# Altium PCB PCB1.PcbDoc (part 3 of 3)
Units mm, origin at the board's own origin, x right, y up, seen from the top; angles counter-clockwise.
Board outline 238 x 185 mm, 2 copper layers (Top Layer, Bottom Layer); 253 components, 247 nets, 920 pads, 36 vias.
Unrouted connection lines stored in the file: 56.
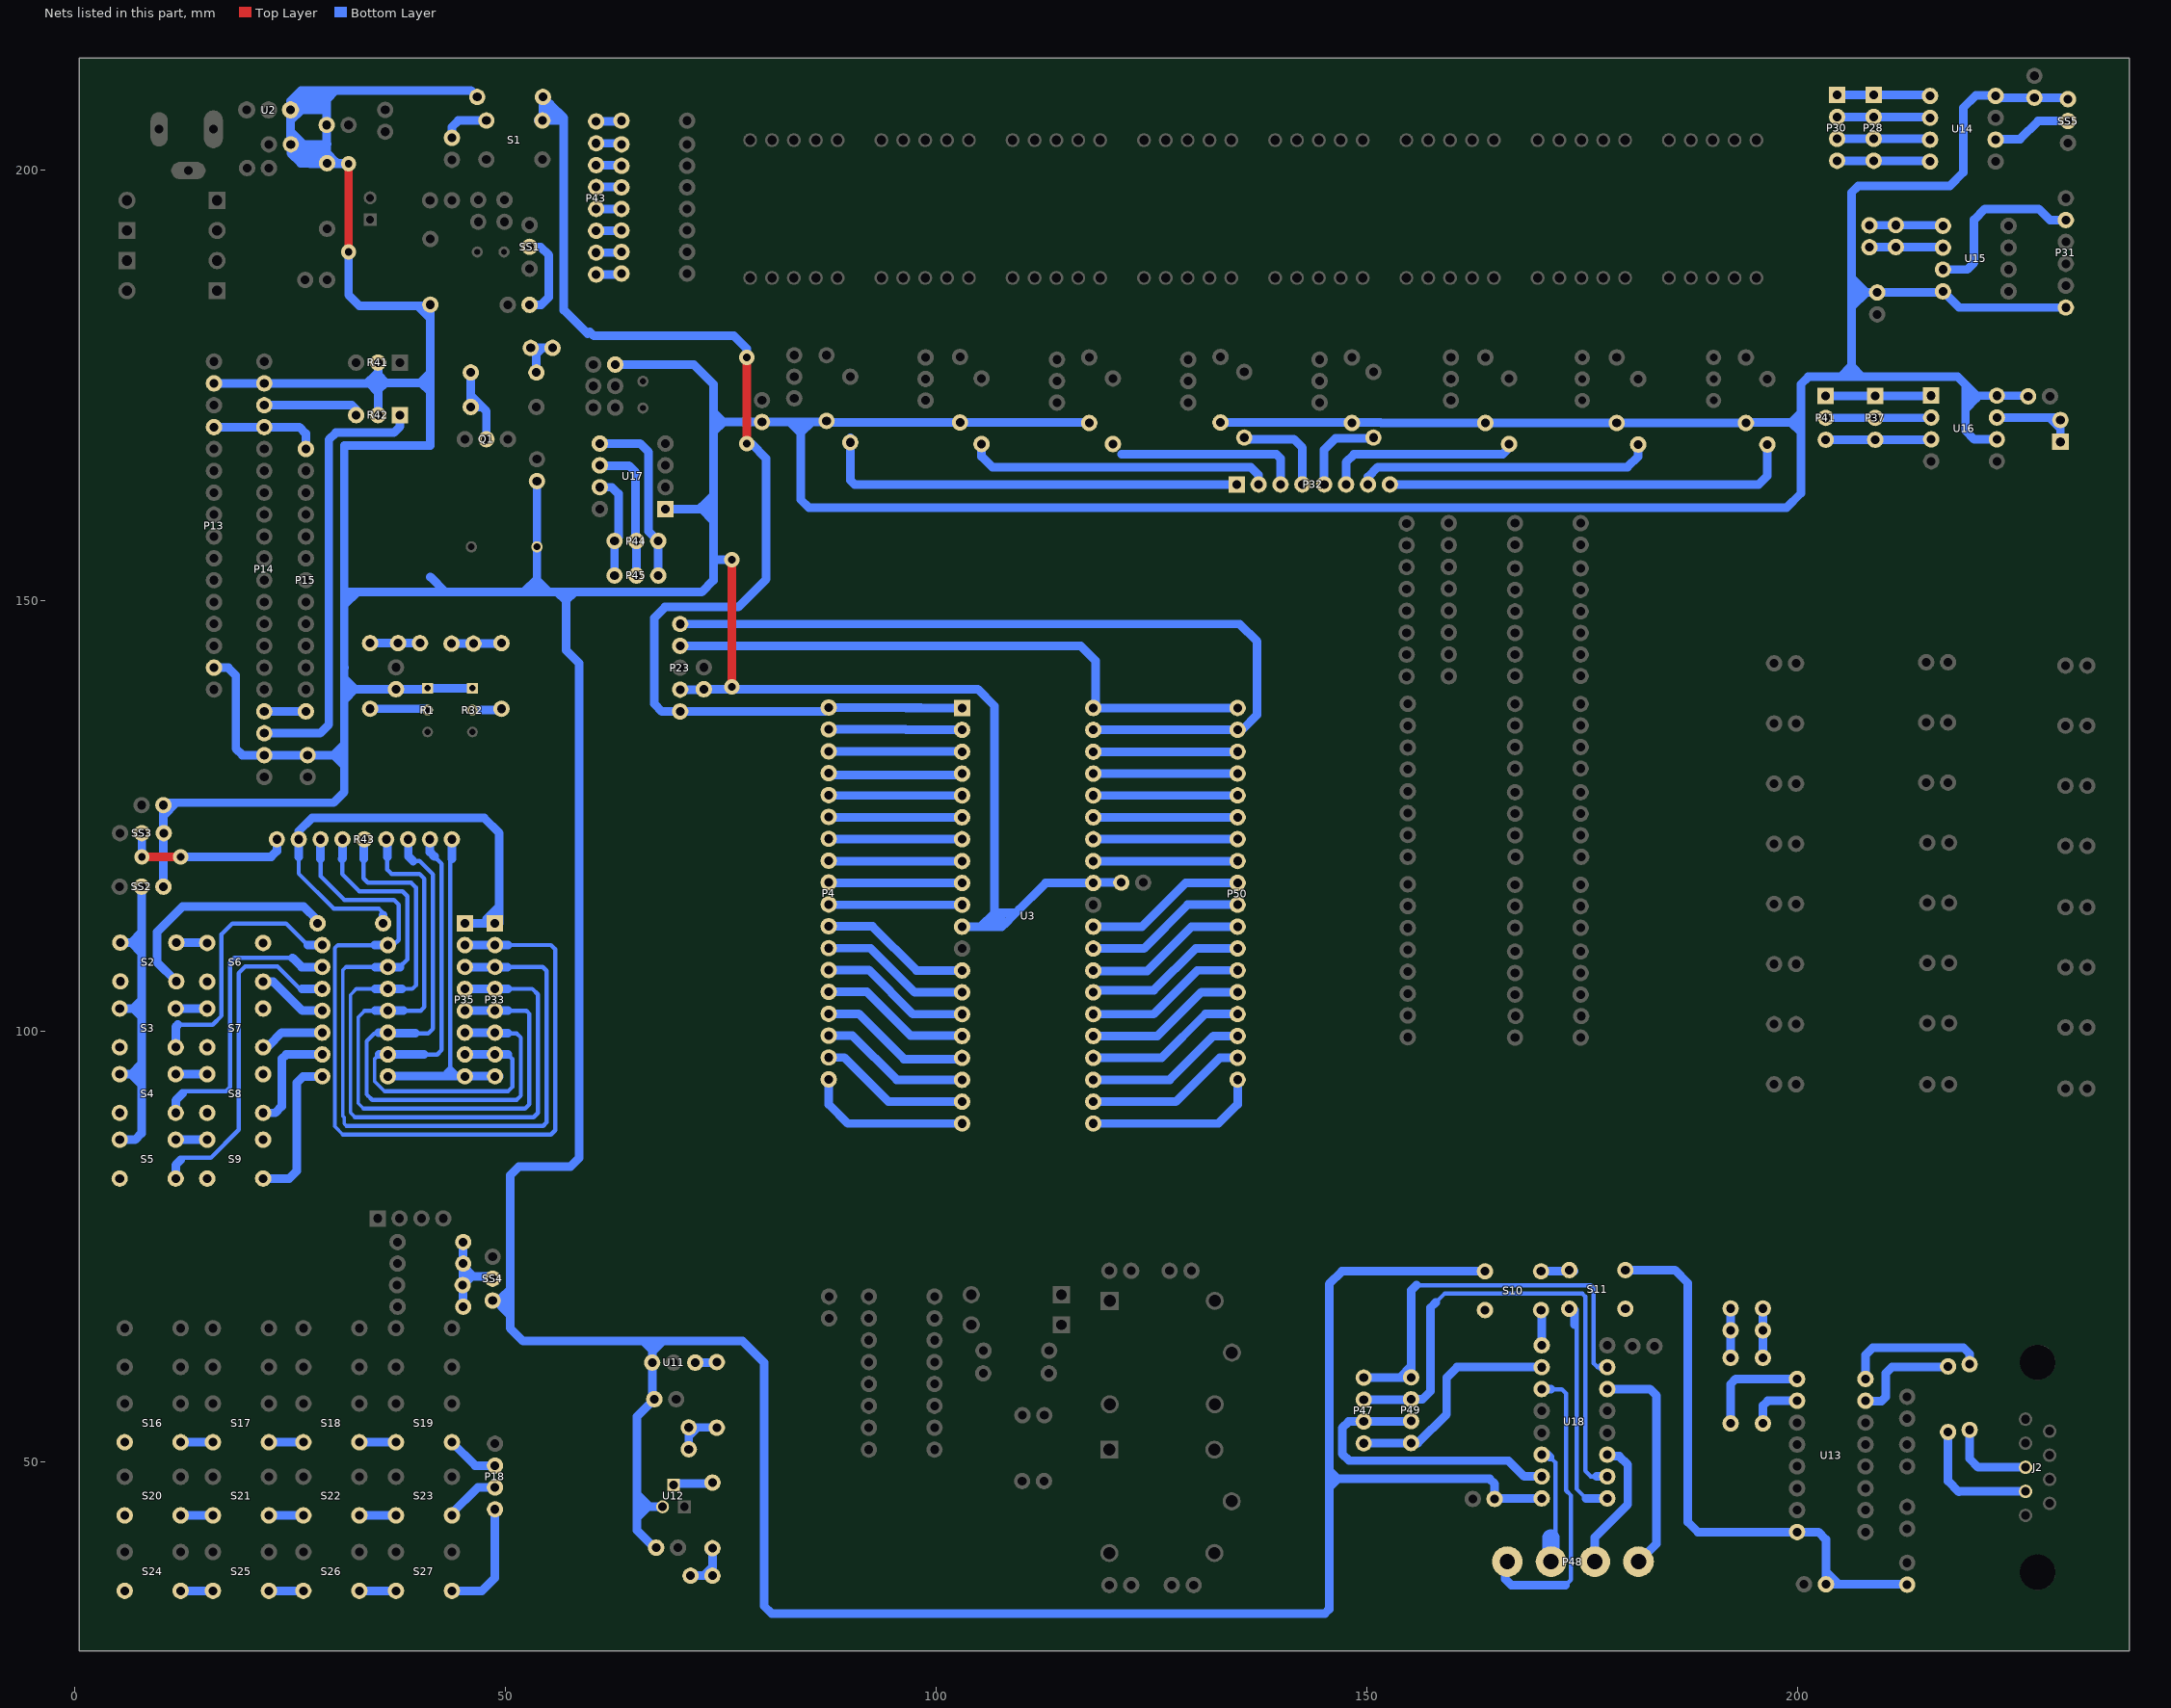
[diagram p3: the nets of this part, all layers, seen from the top]

## Via types
v1: diameter 1.778, hole 0.889, Top Layer to Bottom Layer, 36 vias

## Nets (pads, with @x,y where several pads share a name; then routed paths per layer and width w, separated by ;. In a path a pad name is that pad's centre, name@x,y a point inside that pad or via, vN(x,y) a via of type N, cw(c..) or ccw(c..) an arc to the next point about the centre after c; other vN are vias at no path point) (continued)
NetP18_2: P18.2 S16.3 S16.4 S17.3 S17.4 S18.3 S18.4 S19.3 S19.4 | length 18.1
  Bottom Layer w1: S16.4@12.25,52.25 S17.3@16,52.25 ; S17.4@22.5,52.25 S18.3@26.5,52.25 ; S18.4@33,52.25 S19.3@37.25,52.25 ; S19.4@43.75,52.25 46.46,49.54 P18.2@48.75,49.54
NetP18_3: P18.3 S20.3 S20.4 S21.3 S21.4 S22.3 S22.4 S23.3 S23.4 | length 18.5
  Bottom Layer w1: S20.4@12.25,43.75 S21.3@16,43.75 ; S21.4@22.5,43.75 S22.3@26.5,43.75 ; S22.4@33,43.75 S23.3@37.25,43.75 ; S23.4@43.75,43.75 43.75,44 46.75,47 P18.3@48.75,47
NetP18_4: P18.4 S24.3 S24.4 S25.3 S25.4 S26.3 S26.4 S27.3 S27.4 | length 25.6
  Bottom Layer w1: S24.4@12.25,35 S25.3@16,35 ; S25.4@22.5,35 S26.3@26.5,35 ; S26.4@33,35 S27.3@37.25,35 ; S27.4@43.75,35 47.25,35 48.75,36.5 P18.4@48.75,44.46
NetP19_1: P19.1 R28.1 | length 7.2
  Bottom Layer w1: P19.1@71.46,36.75 73,36.75 ; R28.1@73.603,39.776 R28.1@73.616,39.789 ; R28.1@74,39.94 74,37.75 ; 73,36.75 74,37.75 ; 73,36.75 P19.1@74,36.75 74,37.75
NetP20_1: P20.1 P20.2 R29.2 | length 7
  Bottom Layer w1: P20.2@71,53.973 72.25,53.973 ; P20.1@71.25,51.433 71.25,52.973 ; P20.2@71.25,53.973 71.25,52.973 ; R29.2@74,53.913 73.94,53.973 72.25,53.973 ; 71.25,52.973 72.25,53.973
NetP21_1: P21.1 SS1.2 | length 10.1
  Bottom Layer w1: P21.1@52.77,184.364 54.114,184.364 55,185.25 55,190.135 54.04,191.095 SS1.2@52.77,191.095
NetP22_1: P22.1 P22.2 R31.1 | length 5.7
  Bottom Layer w1: R31.1@195.977,62.06 195.977,64.71 P22.2@195.977,67.79
NetP24_1: P24.1 P24.2 R37.2 | length 6.6
  Bottom Layer w1: R37.2@53.56,176.5 P24.1@53.56,178.69 ; 54.25,179.353 54.223,179.353 ; P24.2@55.437,179.353 54.223,179.353 ; P24.1@53.56,178.69 54.223,179.353 ; P24.1@53.56,178.69 P24.1@52.897,179.353 54.223,179.353
NetP25_1: P25.1 P25.2 R34.2 | length 5.2
  Bottom Layer w1: R34.2@192.227,62.06 192.227,64.75 P25.2@192.227,67.29
NetP26_1: P26.1 P26.2 R38.1 | length 5.8
  Bottom Layer w1: R38.1@34.25,145.06 P26.2@40,145.06
NetP27_1: P27.1 P27.2 R39.1 | length 5.8
  Bottom Layer w1: P27.1@43.71,145 P27.2@46.25,145 49.44,145 R39.1@49.5,145.06
NetP28_1: P28.1 P30.1 U14.1 | length 10.9
  Bottom Layer w1: P30.1@204.591,208.719 P28.1@208.841,208.719 215.431,208.719 U14.1@215.471,208.679
NetP28_2: P28.2 P30.2 U14.2 | length 10.9
  Bottom Layer w1: P30.2@204.591,206.179 P28.2@208.841,206.179 215.431,206.179 U14.2@215.471,206.139
NetP28_3: P28.3 P30.3 U14.3 | length 10.9
  Bottom Layer w1: P30.3@204.591,203.639 P28.3@208.841,203.639 215.431,203.639 U14.3@215.471,203.599
NetP28_4: P28.4 P30.4 U14.4 | length 10.9
  Bottom Layer w1: P30.4@204.591,201.099 P28.4@208.841,201.099 215.431,201.099 U14.4@215.471,201.059
NetP32_1: P32.1 R73.2 | length 50
  Bottom Layer w1: R73.2@90,168.94 90,164 90.5,163.5 P32.1@134.88,163.5
NetP32_2: P32.2 R74.2 | length 35.6
  Bottom Layer w1: R74.2@105.25,168.19 105.25,166.75 106.5,165.5 136.5,165.5 137.42,164.58 P32.2@137.42,163.5
NetP32_3: P32.3 R75.2 | length 21.7
  Bottom Layer w1: 121.5,167 139.5,167 140,166.5 140,163.54 P32.3@139.96,163.5
NetP32_4: P32.4 R76.2 | length 11.5
  Bottom Layer w1: R76.2@135.75,168.94 135.94,168.75 141.5,168.75 142.5,167.75 P32.4@142.5,163.5
NetP32_5: P32.5 R77.2 | length 10.5
  Bottom Layer w1: P32.5@145.04,163.5 145,163.54 145,167.5 146.377,168.877 R77.2@150.687,168.877 ; R77.2@150.687,168.877 150.75,168.877 R77.2@150.75,168.94 R77.2@150.687,168.877
NetP32_6: P32.6 R78.2 | length 22.6
  Bottom Layer w1: P32.6@147.58,163.5 147.58,166.08 148.5,167 165.75,167 166.5,167.75 R78.2@166.5,168.19
NetP32_7: P32.7 R79.2 | length 34.6
  Bottom Layer w1: P32.7@150.12,163.5 150.12,164.37 151.25,165.5 180.25,165.5 181.5,166.75 R79.2@181.5,168.13
NetP32_8: P32.8 R80.2 | length 47.9
  Bottom Layer w1: P32.8@152.66,163.5 195.5,163.5 196.5,164.5 R80.2@196.5,168.13
NetP33_1: P33.1 P35.1 R43.2 R50.2 | length 59.3
  Bottom Layer w0.5: 25.96,120.21 25.96,118.29 30,114.25 35.25,114.25 35.75,113.75
  Bottom Layer w1: 25.96,120.21 R43.2@25.96,122.28 25.96,123.21 27.5,124.75 47.5,124.75 49.25,123 49.25,114.5 ; 35.75,113.5 35.766,113.484 R50.2@35.766,112.53 ; P35.1@45.25,112.53 47.75,112.53 ; 47.75,112.53 P33.1@48.75,112.53 49.25,112.53 49.25,114.5 ; 47.75,112.53 47.75,113 49.25,114.5
NetP33_2: P33.2 P35.2 R43.3 R51.2 | length 105.1
  Bottom Layer w0.4: 30.5,110 30.16,109.66 30.16,88.926 31.086,88
  Bottom Layer w0.5: 28.5,120 28.5,118 31.25,115.25 37,115.25 37.56,114.69 37.56,110.576 R51.2@36.974,109.99 ; 30.5,110 30.51,109.99 34.79,109.99 ; 31.086,88 31.25,88 55.25,88 55.75,88.5 55.75,109.5 55.265,109.985 50.25,110
  Bottom Layer w1: 28.5,120 R43.3@28.5,122.28 ; 34.79,109.99 R51.2@36.31,109.99 ; R51.2@36.35,110.03 R51.2@36.31,109.99 ; R51.2@36.75,110.03 36.71,109.99 R51.2@36.31,109.99 ; P35.2@45.25,109.99 49.25,109.99 50.25,110
NetP33_3: P33.3 P35.3 R43.4 R52.2 | length 97
  Bottom Layer w0.4: 31.45,107.45 31.06,107.06 31.06,90.167 31.25,89.977 31.25,89.25 31.5,89
  Bottom Layer w0.5: 31,120 31,118.25 33,116.25 38,116.25 38.56,115.69 38.56,108.322 37.688,107.45 ; 31.45,107.45 34.83,107.45 ; 31.5,89 54.336,89 54.75,89.414 54.75,107 54.3,107.45 50.2,107.45
  Bottom Layer w1: 31,120 31.04,120.04 R43.4@31.04,122.28 ; 34.83,107.45 R52.2@36.31,107.45 37.688,107.45 ; P35.3@45.25,107.45 50.2,107.45
NetP33_4: P33.4 P35.4 R43.5 R53.2 | length 88.9
  Bottom Layer w0.4: 32.5,90 31.96,90.54 31.96,104.21 32.66,104.91
  Bottom Layer w0.5: 32.5,90 53.25,90 53.75,90.5 53.75,104.25 53.09,104.91 50.25,104.91 ; 32.66,104.91 34.87,104.91 ; 33.5,120 33.5,117.75 34,117.25 39,117.25 39.56,116.69 39.56,105.31 39.16,104.91 37.91,104.91
  Bottom Layer w1: 33.5,120 33.5,122.25 33.55,122.25 R43.5@33.58,122.28 ; 34.87,104.91 R53.2@36.31,104.91 37.91,104.91 ; P35.4@45.25,104.91 50.25,104.91
NetP33_5: P33.5 P35.5 R43.6 R54.2 | length 80
  Bottom Layer w0.4: 33.5,91 32.86,91.64 32.86,101.61 33.62,102.37
  Bottom Layer w0.5: 33.5,91 52.25,91 52.75,91.5 52.75,102 52.38,102.37 50.25,102.37 ; 33.62,102.37 34.84,102.37 ; 36.25,120.25 36.25,118.75 36.75,118.25 40,118.25 40.56,117.69 40.56,102.81 40.12,102.37 38.12,102.37
  Bottom Layer w1: 34.84,102.37 R54.2@36.31,102.37 38.12,102.37 ; R43.6@36.12,122.28 36.15,122.25 36.25,122.25 36.25,120.25 ; P35.5@45.25,102.37 50.25,102.37
NetP33_6: P33.6 P35.6 R43.7 R63.2 | length 70.3
  Bottom Layer w0.4: 33.85,97.618 33.85,92.65 33.96,92.54
  Bottom Layer w0.5: 33.85,97.618 33.85,98.85 34.75,99.75 35.189,99.75 35.269,99.83 ; 33.96,92.54 34.5,92 51.25,92 51.75,92.5 51.75,99.25 51.25,99.75 50.25,99.75 ; 38.75,120.25 38.75,120.5 ; 39.25,119.75 40,119.75 41.56,118.19 41.56,100.31 41,99.75 39.56,99.75 39.53,99.78
  Bottom Layer w1: 35.269,99.83 R63.2@36.31,99.83 36.36,99.78 39.53,99.78 ; R43.7@38.66,122.28 38.69,122.25 38.69,120.31 39.25,119.75 ; P35.6@45.25,99.83 49.25,99.83 49.3,99.78 50.22,99.78
NetP33_7: P33.7 P35.7 R43.8 R64.2 | length 61.5
  Bottom Layer w0.4: 35.29,97.29 34.75,96.75 34.75,94.185 35.935,93
  Bottom Layer w0.5: 35.935,93 50.25,93 50.75,93.5 50.75,96.78 50.25,97.28 ; 40.5,97.28 42.03,97.28 42.56,97.81 42.56,119.422 42.5,119.482 42.5,119.5 41.72,120.28
  Bottom Layer w1: 35.29,97.29 R64.2@36.31,97.29 36.32,97.28 40.5,97.28 ; R43.8@41.2,122.28 41.2,120.8 41.72,120.28 ; P35.7@45.25,97.29 49.25,97.29 49.26,97.28 50.25,97.28
NetP33_8: P33.8 P35.8 R43.9 R65.2 | length 43.6
  Bottom Layer w0.5: 42.75,95.03 43,94.78 43,95.19 43.56,95.75 ; 43.75,94.78 43.56,94.97 43.56,95.75 ; 43.75,120 43.56,119.81 43.56,95.75 ; P35.8@44.5,94.78 44.5,94.81 43.56,95.75
  Bottom Layer w1: R65.2@36.31,94.75 36.34,94.78 43,94.78 43.75,94.78 44.5,94.78 P35.8@45.22,94.78 ; R43.9@43.74,122.28 43.74,120.893 43.75,120.883 43.75,120 ; P35.8@45.25,94.75 P35.8@45.22,94.78 ; P33.8@49.25,94.75 49.22,94.78 P35.8@45.22,94.78
NetP34_1: P34.1 P36.1 U15.6 | length 8.6
  Bottom Layer w1: P36.1@208.353,191.045 208.379,191.071 P34.1@211.409,191.071 216.809,191.071 U15.6@216.88,191
NetP34_2: P34.2 P36.2 U15.5 | length 8.6
  Bottom Layer w1: P36.2@208.353,193.585 208.379,193.611 P34.2@211.409,193.611 216.809,193.611 U15.5@216.88,193.54
NetP37_1: P37.1 P41.1 U16.1 | length 12.3
  Bottom Layer w1: P41.1@203.272,173.768 P37.1@209.022,173.768 215.482,173.768 U16.1@215.522,173.808
NetP37_2: P37.2 P41.2 U16.2 | length 12.3
  Bottom Layer w1: P41.2@203.272,171.228 P37.2@209.022,171.228 215.482,171.228 U16.2@215.522,171.268
NetP37_3: P37.3 P41.3 U16.3 | length 12.3
  Bottom Layer w1: P41.3@203.272,168.688 P37.3@209.022,168.688 215.482,168.688 U16.3@215.522,168.728
NetP39_1: P39.1 P39.2 U16.7 | length 11.8
  Bottom Layer w1: U16.7@223.142,171.268 229.254,171.268 ; P39.1@230.522,168.438 230.522,170 ; 229.254,171.268 230.522,170 ; 229.254,171.268 230.232,171.268 P39.2@230.522,170.978 230.522,170
NetP43_1: P43.1 R62.1 | length 3
  Bottom Layer w0.5: R62.1@63.32,187.88 R62.1@63.44,188
  Bottom Layer w1: P43.1@60.5,187.88 R62.1@63.32,187.88
NetP43_2: P43.2 R61.1 | length 3
  Bottom Layer w1: P43.2@60.5,190.42 63.36,190.42 R61.1@63.44,190.5
NetP43_3: P43.3 R60.1 | length 3
  Bottom Layer w1: P43.3@60.5,192.96 63.4,192.96 R60.1@63.44,193
NetP43_4: P43.4 R59.1 | length 2.9
  Bottom Layer w1: P43.4@60.5,195.5 R59.1@63.44,195.5
NetP43_5: P43.5 R58.1 | length 3
  Bottom Layer w1: P43.5@60.5,198.04 63.4,198.04 R58.1@63.44,198
NetP43_6: P43.6 R57.1 | length 3
  Bottom Layer w1: P43.6@60.5,200.58 63.36,200.58 R57.1@63.44,200.5
NetP43_7: P43.7 R56.1 | length 3
  Bottom Layer w1: P43.7@60.5,203.12 63.32,203.12 R56.1@63.44,203
NetP43_8: P43.8 R55.1 | length 3
  Bottom Layer w1: P43.8@60.5,205.66 63.35,205.66 R55.1@63.44,205.75
NetP44_1: P44.1 P45.1 U17.5 | length 20.9
  Bottom Layer w1: U17.5@60.923,168.253 65.593,168.253 66.585,167.261 66.585,158.051 P44.1@67.713,156.923 P45.1@67.713,152.923
NetP44_2: P44.2 P45.2 U17.6 | length 16.5
  Bottom Layer w1: U17.6@60.923,165.713 60.963,165.673 64.309,165.673 65.085,164.897 65.085,157.43 65.173,157.342 P44.2@65.173,156.923 P45.2@65.173,152.923
NetP44_3: P44.3 P45.3 U17.7 | length 12.1
  Bottom Layer w1: U17.7@60.923,163.173 62.309,163.173 63.085,162.397 63.085,157.375 P44.3@62.633,156.923 P45.3@62.633,152.923
NetP47_1: P47.1 P49.1 U18.15 | length 49.1
  Bottom Layer w0.5: 155.75,70.5 176,70.5 176.335,70.165 176.335,61.415 176.781,60.969
  Bottom Layer w1: P47.1@149.624,59.745 153.814,59.745 ; 155.75,70.5 155.124,69.874 155.124,61.055 ; U18.15@177.219,60.969 U18.15@177.906,60.969 ; 153.814,59.745 155.124,61.055 ; 153.814,59.745 155.084,59.745 P49.1@155.124,59.785 155.124,61.055
NetP47_2: P47.2 P49.2 U18.10 | length 59.7
  Bottom Layer w0.5: 158,68.5 159,69.5 175,69.5 175.335,69.165 175.335,48.934 176,48.269 176.656,48.269
  Bottom Layer w1: P47.2@149.624,57.205 155.084,57.205 P49.2@155.124,57.245 156.454,57.245 157.374,58.165 157.374,67.874 158,68.5 ; 176.656,48.269 U18.10@177.906,48.269
NetP47_3: P47.3 P49.3 U18.7 | length 35.6
  Bottom Layer w1: P49.3@155.124,54.705 155.084,54.665 P47.3@149.624,54.665 147.874,54.665 147.124,53.915 147.124,50.915 147.924,50.115 166.424,50.115 168.27,48.269 U18.7@170.286,48.269
NetP47_4: P47.4 P49.4 U18.2 | length 27.1
  Bottom Layer w1: P47.4@149.624,52.125 149.664,52.165 P49.4@155.124,52.165 155.915,52.165 159.25,55.5 159.25,59.75 160.469,60.969 U18.2@170.286,60.969 U18.2@170.616,60.969
NetP48_1: P48.1 U18.3 | length 35.3
  Bottom Layer w0.5: 171.374,58.415 172.624,58.415 173.124,57.915 173.124,46.637 173.704,46.057 173.704,36.307 173.036,35.639
  Bottom Layer w1: P48.1@166.296,38.389 166.036,38.129 166.036,36.389 166.786,35.639 173.036,35.639 ; U18.3@170.246,58.389 U18.3@170.286,58.429 170.3,58.415 171.374,58.415
NetP48_2: P48.2 U18.6 | length 13.6
  Bottom Layer w0.5: 171.268,50.521 171.874,49.915 171.874,41.665
  Bottom Layer w1: U18.6@170.456,50.639 U18.6@170.286,50.809 170.98,50.809 171.268,50.521 ; P48.2@171.376,38.389 P48.2@171.624,38.637
  Bottom Layer w2: P48.2@171.376,38.389 171.376,41.167
NetP48_3: P48.3 U18.11 | length 15.7
  Bottom Layer w1: P48.3@176.456,38.389 176.456,41.206 180.282,45.032 180.282,49.643 179.286,50.639 178.076,50.639 U18.11@177.906,50.809
NetP48_4: P48.4 U18.14 | length 26.2
  Bottom Layer w1: U18.14@177.906,58.429 182.86,58.429 183.624,57.665 183.624,40.477 P48.4@181.536,38.389
NetQ1_2: Q1.2 R37.1 R40.2 | length 10.3
  Bottom Layer w1: R40.2@45.94,172.75 45.94,173.75 ; R37.1@45.94,176.5 45.94,173.75 ; R40.2@46.5,172.5 47.25,172.5 ; Q1.2@47.75,168.75 47.75,172 47.25,172.5 ; 45.94,173.75 46,173.75 47.25,172.5
NetR1_2: R1.2 R38.2 | length 6.7
  Bottom Layer w1: R38.2@34.25,137.44 40.775,137.44 R1.2@40.925,137.29
NetR28_2: R28.2 U12.2 | length 3.9
  Bottom Layer w1: U12.2@69.75,47.473 73.552,47.473 R28.2@73.616,47.409
NetR29_1: R29.1 U11.OUT | length 2
  Bottom Layer w1: U11.OUT@72.001,61.5 73.967,61.5 R29.1@74,61.533
NetR30_2: R30.2 U13.8 | length 16.7
  Bottom Layer w1: U13.8@207.886,59.605 207.886,62.386 208.75,63.25 219.25,63.25 219.977,62.523 R30.2@219.977,61.31
NetR31_2: R31.2 U13.10 | length 6.3
  Bottom Layer w1: R31.2@195.977,54.44 195.977,56.5 196.542,57.065 U13.10@199.946,57.065
NetR32_2: R32.2 R39.2 | length 3.1
  Bottom Layer w1: R32.2@46.132,137.29 49.227,137.29 R39.2@49.25,137.267
NetR33_2: R33.2 R66.2 R67.2 R68.2 SS4.2 | length 14.1
  Bottom Layer w1: R67.2@45,70.5 R67.2@45.06,70.56 ; R68.2@45.06,68 R67.2@45.06,70.56 ; R33.2@45.06,75.5 R66.2@45.06,73 R66.2@45.06,72.69 ; SS4.2@48.48,71.25 48.23,71.5 46.25,71.5 ; R67.2@45.06,70.56 46,71.5 ; R67.2@45.06,70.56 45.06,71.5 ; 45.06,71.5 46,71.5 ; 45.06,71.5 R66.2@45.06,72.69 ; R66.2@45.06,72.69 46.25,71.5 ; 46,71.5 46.25,71.5
NetR34_1: R34.1 U13.9 | length 12.6
  Bottom Layer w1: R34.1@192.227,54.44 192.227,59 192.832,59.605 U13.9@199.977,59.605
NetR36_1: R36.1 U13.7 | length 13.1
  Bottom Layer w1: U13.7@207.886,57.065 207.951,57 209.727,57 210.227,57.5 210.227,60.25 210.977,61 R36.1@217.667,61
NetR43_1: R43.1 SS3.2 | length 20.1
  Top Layer w1: v1(7.75,120.25) v1(12.25,120.25)
  Bottom Layer w1: v1(7.75,120.25) SS3.2@7.75,123 ; v1(12.25,120.25) 22.75,120.25 23.42,120.92 R43.1@23.42,122.28
NetR50_1: R50.1 S2.3 S2.4 | length 27.9
  Bottom Layer w1: S2.4@11.53,106 S2.4@11.75,105.78 9.5,108.03 9.5,111.5 12.5,114.5 26.5,114.5 28.146,112.854 R50.1@28.146,112.53
NetR51_1: R51.1 S3.3 S3.4 | length 30.9
  Bottom Layer w0.5: 11.927,100.75 15.97,100.75 17,101.78 17,111.25 18.25,112.5 24.5,112.5 27.01,109.99
  Bottom Layer w1: S3.4@11.675,98.124 11.675,100.498 11.927,100.75 ; 27.01,109.99 R51.1@28.69,109.99
NetR52_1: R52.1 S4.3 S4.4 | length 34.2
  Bottom Layer w0.5: 12.5,92.78 12.75,93.03 17.53,93.03 18,93.5 18,108 18.5,108.5 25.25,108.5
  Bottom Layer w1: S4.4@11.675,90.504 11.675,91.955 12.5,92.78 ; 25.25,108.5 26.3,107.45 R52.1@28.69,107.45
NetR53_1: R53.1 S5.3 S5.4 | length 40.2
  Bottom Layer w0.5: 12.25,85.03 12.5,85.28 15.75,85.28 19,88.53 19,106.75 19.75,107.5 23.5,107.5 26.09,104.91 26.5,104.91
  Bottom Layer w1: S5.4@11.675,82.884 11.675,84.455 12.25,85.03 ; 26.34,104.91 R53.1@28.69,104.91 R53.1@28.57,105.03
NetR54_1: R54.1 S6.3 S6.4 | length 8.3
  Bottom Layer w1: S6.4@21.835,105.744 23.006,105.744 26.38,102.37 R54.1@28.69,102.37
NetR63_1: R63.1 S7.3 S7.4 | length 7.6
  Bottom Layer w1: S7.4@21.835,98.124 22,98.289 22.442,98.289 23.983,99.83 R63.1@28.69,99.83
NetR64_1: R64.1 S8.3 S8.4 | length 12.9
  Bottom Layer w1: S8.4@21.835,90.504 23.224,90.504 24,91.28 24,96.78 24.51,97.29 R64.1@28.69,97.29
NetR65_1: R65.1 S9.3 S9.4 | length 17.8
  Bottom Layer w1: S9.4@21.835,82.884 24.854,82.884 25.75,83.78 25.75,94.03 26.47,94.75 R65.1@28.69,94.75
NetS2_1: S2.1 S2.2 S3.1 S3.2 S4.1 S4.2 S5.1 S5.2 S6.1 S6.2 S7.1 S7.2 S8.1 S8.2 S9.1 S9.2 SS2.2 | length 63.1
  Bottom Layer w1: S5.1@5.175,87.384 6.948,87.384 7.71,88.146 7.71,93.794 ; S4.1@5.175,95.004 6.5,95.004 ; S3.1@5.175,102.624 6.75,102.624 ; S2.1@5.25,110.28 6.5,110.28 ; 7.626,102.624 6.75,102.624 ; SS2.2@7.71,116.78 7.71,111.49 ; SS2.2@7.75,116.74 SS2.2@7.79,116.78 ; S5.2@11.675,87.384 S9.1@15.335,87.384 ; S4.2@11.675,95.004 S8.1@15.335,95.004 ; S3.2@11.675,102.624 S7.1@15.335,102.624 ; S2.2@11.75,110.28 12.477,110.28 12.481,110.284 13.519,110.284 13.523,110.28 15.299,110.28 S6.1@15.335,110.244 ; 6.5,95.004 7.71,96.214 ; 6.5,95.004 7.706,95.004 7.71,95 ; 6.5,95.004 7.71,93.794 ; 6.5,110.28 7.71,111.49 ; 6.5,110.28 7.675,110.28 7.71,110.245 ; 6.5,110.28 7.71,109.07 ; 6.75,102.624 7.71,103.584 ; 6.75,102.624 7.624,101.75 7.71,101.75 ; 7.71,93.794 7.71,95 ; 7.71,95 7.71,96.214 ; 7.71,96.214 7.71,101.75 ; 7.71,101.75 7.71,103.584 ; 7.71,103.584 7.71,109.07 ; 7.71,109.07 7.71,110.245 ; 7.71,110.245 7.71,111.49
NetS10_3: S10.3 S10.4 U18.1 | length 4.1
  Bottom Layer w1: U18.1@170.286,63.509 S10.4@170.286,67.639
NetS11_3: S11.3 S11.4 U18.9 | length 24.9
  Bottom Layer w0.5: 174.124,65.915 174.335,65.704 174.335,46.84 175.446,45.729
  Bottom Layer w1: S11.3@174.036,67.639 174.085,67.59 174.085,65.915 ; 175.446,45.729 U18.9@177.906,45.729
NetSS5_2: SS5.2 U14.6 | length 9.2
  Bottom Layer w1: U14.6@223.091,203.599 225.831,203.599 227.937,205.705 SS5.2@231.397,205.705
OSC11: 
OSC21: 
RA0: P4.2 U3.2 | length 15.5
  Bottom Layer w1: P4.2@87.5,135.04 96.426,135.04 96.476,134.99 U3.2@102.986,134.99
RA1: P4.3 U3.3 | length 15.5
  Bottom Layer w1: P4.3@87.5,132.5 102.936,132.5 U3.3@102.986,132.45
RA2: P4.4 U3.4 | length 15.6
  Bottom Layer w1: P4.4@87.5,129.96 87.71,129.75 102.826,129.75 U3.4@102.986,129.91
RA3: P4.5 U3.5 | length 15.5
  Bottom Layer w1: P4.5@87.5,127.42 87.55,127.37 U3.5@102.986,127.37
RA4: P4.6 U3.6 | length 15.5
  Bottom Layer w1: P4.6@87.5,124.88 87.55,124.83 U3.6@102.986,124.83
RA5: P4.7 U3.7 | length 15.5
  Bottom Layer w1: P4.7@87.5,122.34 87.55,122.29 U3.7@102.986,122.29
RA6: P4.12 U3.14 | length 17.6
  Bottom Layer w1: P4.12@87.5,109.64 92.36,109.64 97.5,104.5 101.476,104.5 101.486,104.51 U3.14@102.986,104.51
RA7: P4.11 U3.13 | length 17.6
  Bottom Layer w1: P4.11@87.5,112.18 92.57,112.18 97.7,107.05 U3.13@102.986,107.05
RB0: P50.11 U3.33 | length 16.8
  Bottom Layer w1: U3.33@118.226,119.75 134.966,119.75 P50.11@134.976,119.76
RB1: P50.12 U3.34 | length 16.8
  Bottom Layer w1: U3.34@118.226,122.29 134.966,122.29 P50.12@134.976,122.3
RB2: P50.13 U3.35 | length 16.8
  Bottom Layer w1: U3.35@118.226,124.83 134.966,124.83 P50.13@134.976,124.84
RB3: P50.14 U3.36 | length 16.8
  Bottom Layer w1: U3.36@118.226,127.37 134.966,127.37 P50.14@134.976,127.38
RB4: P50.15 U3.37 | length 16.8
  Bottom Layer w1: U3.37@118.226,129.91 134.966,129.91 P50.15@134.976,129.92
RB5: P50.16 U3.38 | length 16.8
  Bottom Layer w1: U3.38@118.226,132.45 134.966,132.45 P50.16@134.976,132.46
RB6: P23.1 P50.17 U3.39 | length 96.1
  Bottom Layer w1: P23.1@70.25,147.29 135.21,147.29 137.25,145.25 137.25,136.75 135.5,135 P50.17@134.976,135 134.966,134.99 U3.39@118.226,134.99
RB7: P23.2 P50.18 U3.40 | length 71.3
  Bottom Layer w1: P23.2@70.25,144.75 116.75,144.75 118.5,143 118.5,137.804 U3.40@118.226,137.53 134.966,137.53 P50.18@134.976,137.54
RC0: P4.13 U3.15 | length 17.6
  Bottom Layer w1: P4.13@87.5,107.1 92.15,107.1 97.28,101.97 101.506,101.97 U3.15@102.986,101.97
RC1: P4.14 U3.16 | length 17.6
  Bottom Layer w1: P4.14@87.5,104.56 91.94,104.56 97,99.5 101.396,99.5 102.916,99.5 U3.16@102.986,99.43
RC2: P4.15 U3.17 | length 17.7
  Bottom Layer w1: P4.15@87.5,102.02 90.98,102.02 96.25,96.75 102.846,96.75 U3.17@102.986,96.89
RC3: P4.16 U3.18 | length 17.8
  Bottom Layer w1: P4.16@87.5,99.48 90.27,99.48 95.4,94.35 U3.18@102.986,94.35 U3.18@102.836,94.5
RC4: P50.3 U3.23 | length 18.9
  Bottom Layer w1: U3.23@118.226,94.35 127.1,94.35 132.19,99.44 P50.3@134.976,99.44
RC5: P50.4 U3.24 | length 18.9
  Bottom Layer w1: U3.24@118.226,96.89 126.14,96.89 131.25,102 134.956,102 P50.4@134.976,101.98
RC6: P50.5 U3.25 | length 18.9
  Bottom Layer w1: U3.25@118.226,99.43 125.68,99.43 130.77,104.52 P50.5@134.976,104.52
RC7: P50.6 U3.26 | length 18.9
  Bottom Layer w1: U3.26@118.226,101.97 125.22,101.97 130.31,107.06 P50.6@134.976,107.06
RD0: P4.17 U3.19 | length 17.6
  Bottom Layer w1: P4.17@87.5,96.94 89.31,96.94 94.44,91.81 U3.19@102.986,91.81
RD1: P4.18 U3.20 | length 19.3
  Bottom Layer w1: P4.18@87.5,94.4 87.5,91.5 89.73,89.27 U3.20@102.986,89.27
RD2: P50.1 U3.21 | length 20.5
  Bottom Layer w1: U3.21@118.226,89.27 132.746,89.27 134.976,91.5 P50.1@134.976,94.36
RD3: P50.2 U3.22 | length 18.9
  Bottom Layer w1: U3.22@118.226,91.81 127.81,91.81 132.9,96.9 P50.2@134.976,96.9
RD4: P50.7 U3.27 | length 18.9
  Bottom Layer w1: U3.27@118.226,104.51 118.466,104.75 125.25,104.75 130.1,109.6 P50.7@134.976,109.6
RD5: P50.8 U3.28 | length 18.9
  Bottom Layer w1: U3.28@118.226,107.05 118.276,107 124.5,107 129.64,112.14 P50.8@134.976,112.14
RD6: P50.9 U3.29 | length 18.9
  Bottom Layer w1: U3.29@118.226,109.59 124.09,109.59 129.18,114.68 P50.9@134.976,114.68
RD7: P50.10 U3.30 | length 18.9
  Bottom Layer w1: U3.30@118.226,112.13 123.88,112.13 128.97,117.22 P50.10@134.976,117.22
RE0: P4.8 U3.8 | length 15.9
  Bottom Layer w1: P4.8@87.5,119.8 87.55,119.75 U3.8@102.986,119.75 U3.8@102.736,119.5
RE1: P4.9 U3.9 | length 15.5
  Bottom Layer w1: P4.9@87.5,117.26 87.55,117.21 U3.9@102.986,117.21
RE2: P4.10 U3.10 | length 15.7
  Bottom Layer w1: P4.10@87.5,114.72 87.55,114.67 U3.10@102.986,114.67 U3.10@102.816,114.5
reset: C19.2 P4.1 P23.5 R35.1 S1.3 S1.4 U3.1 | length 155.1
  Top Layer w1: v1(77.997,178.247) 77.997,168.252 v1(78,168.25)
  Bottom Layer w1: C19.2@43.75,203.75 43.75,205.011 44.5,205.761 S1.4@47.749,205.761 ; S1.3@53.761,205.761 S1.3@54.251,205.761 ; v1(77.997,178.247) 77.997,179.252 76.5,180.75 60.245,180.75 59.747,181.248 59.5,181 56.75,183.75 56.75,206.06 ; v1(78,168.25) 78.5,168.25 80.25,166.5 80.25,152.5 77,149.25 68.5,149.25 67.25,148 67.25,138 68.12,137.13 P23.5@70.25,137.13 87.05,137.13 P4.1@87.5,137.58 98.2,137.58 98.25,137.53 ; 96.476,137.53 98.25,137.53 ; U3.1@102.726,137.79 U3.1@102.986,137.53 98.25,137.53 ; S1.3@54.251,205.761 54.31,205.819 R35.1@54.31,208.5 55.155,207.655 ; S1.3@54.251,205.761 55.5,205.761 ; 55.155,206.88 55.5,206.535 55.5,205.761 ; 55.155,206.88 55.155,206.106 55.5,205.761 ; 55.155,206.88 55.155,207.655 ; 55.155,207.655 56.75,206.06 ; 55.5,205.761 56.451,205.761 56.75,206.06
rs: P13.4 P14.4 P15.1 | length 12.8
  Bottom Layer w1: P13.4@16.121,170.156 P14.4@21.963,170.156 26.027,170.156 26.789,169.394 P15.1@26.789,167.616
rst: P14.17 P15.13 | length 4.8
  Bottom Layer w1: P14.17@21.963,137.136 P15.13@26.789,137.136
Rx: J2.3 R30.1 | length 10.3
  Bottom Layer w1: R30.1@219.977,53.69 219.977,50.338 220.977,49.338 J2.3@226.477,49.338
T0CKI: 
Tx: J2.2 R36.2 | length 15.2
  Bottom Layer w1: R36.2@217.477,53.44 217.477,47.75 218.727,46.5 218.771,46.544 224.227,46.544 ; 224.211,46.56 224.227,46.544 ; J2.2@226.477,46.544 224.227,46.544
VCC: BUZ1.P C2.2 C4.1 C5.2 C7.2 C8.1 C11.2 C12.2 C13.2 C14.2 C16.2 C20.2 C21.2 C22.2 C23.2 C24.2 C25.2 C26.1 C27.2 P13.2 P13.15 P14.2 P14.19 P23.4 P31.1 R1.1 R5.2 R27.2 R32.1 R35.2 R41.2 R42.2 R44.2 R45.2 R46.2 R47.2 R48.2 R49.2 R71.2 R72.2 S10.1 S10.2 S11.1 S11.2 SS2.1 SS3.1 SS4.1 SS5.1 U2.3 U3.11 U3.32 U11.VCC U12.1 U13.16 U14.8 U15.8 U16.6 U16.8 U17.1 U18.8 | length 1336.2
  Top Layer w1: v1(31.75,190.5) v1(31.75,200.75) ; v1(76.25,140) v1(76.25,154.75)
  Bottom Layer w1: 10.25,125 10.25,124.03 ; SS2.1@10.33,116.86 SS2.1@10.25,116.78 10.25,124.03 ; P13.15@16.121,142.216 17.772,142.216 18.661,141.327 18.661,132.818 19.423,132.056 P14.19@21.963,132.056 28.25,132.056 ; P13.2@16.121,175.236 P14.2@21.963,175.236 33.901,175.236 ; 28.25,132.03 28.25,132.056 ; 31.25,141.25 31.25,140.96 ; 31.29,142.21 31.25,142.25 ; v1(31.75,190.5) 31.75,185.5 33,184.25 39.75,184.25 ; v1(31.75,200.75) v1@31.25,200.75 ; 33,151 32.75,151 ; R42.2@35.171,171.553 35.171,174.22 ; R41.2@35.171,177.649 35.171,176.252 ; 37.63,168.03 37.621,168.021 ; 41.25,152.75 43,151 ; 43.75,151 43,151 ; R32.1@46.132,139.83 R1.1@40.925,139.83 40.805,139.71 32.5,139.71 ; R35.2@46.69,208.5 45.94,209.25 30.25,209.25 ; SS4.1@48.23,68.71 SS4.1@48.48,68.71 49.5,68.71 ; 50.25,68.71 49.5,68.71 ; C13.2@53.775,163.734 C13.2@53.625,163.885 BUZ1.P@53.625,156.25 53.625,152.5 ; C27.2@62.713,177.423 71.827,177.423 74.111,175.139 74.111,171.889 ; U11.VCC@66.791,61.71 U11.VCC@67.001,61.5 ; 67,62.751 67.001,62.75 ; C8.1@67.204,40.046 65.25,42 65.25,43.5 ; U12.1@68.21,44.75 66.73,44.75 ; U17.1@68.543,160.633 72.75,160.633 ; 68.75,64 68.251,64 ; P23.4@70.25,139.67 72.96,139.67 C16.2@73,139.71 104.79,139.71 106.75,137.75 106.75,113.75 ; 74.111,172.25 74.111,171.889 ; v1(76.25,154.75) 74.361,154.75 74.111,155 ; R44.2@87.25,170.88 87.12,170.75 85.5,170.75 ; R44.2@87.931,170.69 R45.2@102.75,170.69 R46.2@118,170.69 ; U3.11@102.986,112.13 105.13,112.13 ; 109.111,113.635 108.976,113.5 ; 109.613,114.137 109.226,113.75 ; C5.2@121.476,117.25 118.266,117.25 U3.32@118.226,117.21 112.686,117.21 109.226,113.75 ; R47.2@133,170.69 133,170.693 148.187,170.693 R48.2@148.25,170.63 148.25,170.693 151.58,170.693 151.642,170.63 R49.2@163.75,170.63 R71.2@179,170.63 R72.2@194,170.63 R72.2@194,170.69 ; S10.1@163.711,72.103 147.103,72.103 145.624,70.624 145.624,49 ; C26.1@164.826,45.665 C26.1@164.826,45.729 ; U18.8@170.126,45.889 U18.8@170.286,45.729 ; U18.8@170.254,45.697 U18.8@170.286,45.729 ; S10.2@170.286,72.139 S11.1@174.036,72.139 ; S11.2@180,72.25 185.75,72.25 187.25,70.75 187.25,43 188.425,41.825 U13.16@199.946,41.825 202.425,41.825 203.29,40.96 203.29,37.25 ; R72.2@194,170.693 R72.2@194,170.69 ; 200.397,172.25 200.397,171.837 ; 205,35.75 204.79,35.75 ; 206.25,176.5 206.25,177.25 ; 206.25,186 206.25,187.5 ; C12.2@212.977,35.71 212.937,35.75 204.79,35.75 ; U14.8@223.091,208.642 223.091,208.415 SS5.1@231.035,208.415 ; U14.8@223.091,208.679 220.679,208.679 219.25,207.25 219.25,199.75 217.665,198.165 207.03,198.165 206.25,197.385 206.25,187.5 ; U16.6@223.142,168.728 220.522,168.728 219.5,169.75 219.5,172.25 ; C25.2@226.772,173.728 226.692,173.808 U16.8@223.142,173.808 220.75,173.808 ; P31.1@231.147,184.045 218.755,184.045 U15.8@216.88,185.92 216.75,185.79 C24.2@209.25,185.79 207.96,185.79 ; 10.25,124.03 10.25,125.03 ; 10.25,125.03 11.75,126.53 ; 10.25,125.03 C23.2@10.25,126.25 10.25,126.53 11.75,126.53 ; 11.75,126.53 30,126.53 31.25,127.78 31.25,130.832 ; 25,204.5 25,203.04 C2.2@25.04,203 ; 25,204.5 25,205.73 ; 25,204.5 26.5,203 ; 25,205.73 U2.3@25,207 ; 25,205.73 26.27,207 ; U2.3@25,207 26.27,207 ; U2.3@25,207 25,208 26.25,209.25 27,209.25 ; U2.3@25,207 27,209 27,209.25 ; C2.2@25.04,203 26.5,203 ; C2.2@25.04,203 25.04,201.96 26.19,200.81 27.23,200.81 ; C2.2@25.04,203 27.23,200.81 ; 26.27,207 27.25,207 ; 26.27,207 28.25,208.98 28.25,209.25 ; 26.5,203 27,202.5 ; 26.5,203 28.21,203 ; 27,202.5 28.5,201 R5.2@29.21,201 ; 27,202.5 26.25,202.5 27.94,200.81 ; 27,202.5 28,202.5 R5.2@29.21,201.29 ; 27,209.25 28.25,209.25 ; 27.23,200.81 27.94,200.81 ; 27.23,200.81 27.29,200.75 v1@31.25,200.75 ; 27.25,207 29,208.75 29,209.25 ; 27.25,207 28,207 ; 27.94,200.81 R5.2@29.25,200.81 ; 28,207 29.21,208.21 ; 28,207 29.21,207 ; 28.21,203 29.21,202 ; 28.21,203 29.19,203 29.21,203.02 ; 28.25,132.056 30.026,132.056 ; 28.25,209.25 29,209.25 ; 29,209.25 30.25,209.25 ; R5.2@29.21,201 29.21,200.85 R5.2@29.25,200.81 ; R5.2@29.21,201 R5.2@29.21,201.29 ; R5.2@29.21,201 29.5,201 R5.2@29.21,201.29 ; R5.2@29.21,201.29 29.21,202 ; 29.21,202 29.21,203.02 ; 29.21,202 30.25,200.96 30.25,200.81 ; 29.21,203.02 29.21,203.1 ; 29.21,203.02 29.25,203.06 29.21,203.1 ; 29.21,203.1 C4.1@29.21,205.25 29.21,207 ; 29.21,207 29.21,208.21 ; 29.21,208.21 30.25,209.25 ; R5.2@29.25,200.81 30.25,200.81 ; 30.026,132.056 31.25,130.832 ; 30.026,132.056 31.224,132.056 31.25,132.03 ; 30.026,132.056 31.25,133.28 ; 30.25,200.81 31.19,200.81 v1@31.25,200.75 ; 31.25,130.832 31.25,132.03 ; 31.25,132.03 31.25,133.28 ; 31.25,133.28 31.25,138.46 ; 31.25,138.46 31.25,139.75 ; 31.25,138.46 32.5,139.71 ; 31.25,139.75 31.25,140.96 ; 31.25,139.75 31.29,139.71 32.5,139.71 ; 31.25,140.96 31.25,142.25 ; 31.25,140.96 32.5,139.71 ; 31.25,142.25 31.25,149.5 ; 31.25,149.5 32.75,151 ; 31.25,149.5 31.25,150.75 ; 31.25,150.75 31.5,151 32.75,151 ; 31.25,150.75 31.25,168 31.271,168.021 37.621,168.021 ; 32.75,151 43,151 ; 33.901,175.236 34.917,176.252 35.171,176.252 ; 33.901,175.236 34.155,175.236 ; 34.155,175.236 35.171,174.22 ; 34.155,175.236 34.917,175.236 35.171,174.982 ; 35.171,174.22 35.171,174.451 ; 35.171,174.451 35.171,174.982 ; 35.171,174.451 36,175.28 ; 35.171,174.982 35.171,175.28 ; 35.171,175.28 35.171,176.252 ; 35.171,175.28 36,175.28 ; 35.171,176.252 36.143,175.28 ; 36,175.28 36.143,175.28 ; 36.143,175.28 40.03,175.28 ; 37.621,168.021 37.642,168 41.25,168 41.25,174.25 ; 39.75,184.25 41.25,182.75 ; 39.75,184.25 41.12,184.25 R27.2@41.25,184.38 41.25,182.75 ; 40.03,175.28 40.22,175.28 ; 40.03,175.28 41.25,176.5 ; 40.22,175.28 41.03,175.28 41.25,175.5 ; 40.22,175.28 41.25,174.25 ; 41.25,174.25 41.25,175.5 ; 41.25,175.5 41.25,176.5 ; 41.25,176.5 41.25,182.75 ; 43,151 52.25,151 ; 49.5,68.71 49.5,68 50.5,67 ; 49.5,68.71 49.5,69 50.5,70 ; 50.5,67 50.5,65.5 52,64 66,64 ; 50.5,67 50.5,70 ; 50.5,70 50.5,83.25 51.5,84.25 57.5,84.25 58.5,85.25 58.5,142.75 57,144.25 57,150.75 56.75,151 ; 52.25,151 53.25,151 ; 52.25,151 52.25,151.125 53.625,152.5 ; 53.25,151 55,151 ; 53.25,151 53.625,151.375 53.625,152.375 ; 53.625,152.375 53.625,152.5 ; 53.625,152.375 55,151 ; 55,151 56,151 ; 56,151 56.75,151 ; 56,151 57,150 58,151 ; 56.75,151 58,151 ; 58,151 72.75,151 74.111,152.361 74.111,155 ; 65.25,43.5 66.5,44.75 ; 65.25,43.5 65.25,44.75 ; 65.25,44.75 65.25,46 ; 65.25,44.75 66.5,44.75 ; 65.25,46 65.48,46 66.73,44.75 ; 65.25,46 65.25,55.25 C7.2@67.25,57.25 67.001,57.499 U11.VCC@67.001,61.5 ; 66,64 67.001,62.999 ; 66,64 67.75,64 ; 66.5,44.75 66.73,44.75 ; U11.VCC@67.001,61.5 67.001,62.75 ; 67.001,62.75 67.001,62.999 ; 67.001,62.75 68.251,64 ; 67.001,62.999 67.001,63.251 67.75,64 ; 67.75,64 68.251,64 ; 68.251,64 77.5,64 80,61.5 80,33.243 80.871,32.371 145.121,32.371 145.624,32.874 145.624,47 ; 72.75,160.633 74.111,159.272 ; 72.75,160.633 73.728,160.633 74.111,160.25 ; 72.75,160.633 72.75,160.889 74.111,162.25 ; 74.111,155 74.111,159.272 ; 74.111,159.272 74.111,160.25 ; 74.111,160.25 74.111,162.25 ; 74.111,162.25 74.111,169.611 ; 74.111,169.611 75.25,170.75 ; 74.111,169.611 74.111,170.75 ; 74.111,170.75 74.111,171.889 ; 74.111,170.75 75.25,170.75 ; 74.111,171.889 75.25,170.75 ; 75.25,170.75 C22.2@79.75,170.75 83,170.75 ; 83,170.75 84.25,169.5 ; 83,170.75 84.25,170.75 ; 84.25,169.5 84.25,161.75 85.211,160.789 198.711,160.789 200.397,162.475 200.397,169.543 ; 84.25,169.5 84.25,170.75 ; 84.25,169.5 85.5,170.75 ; 84.25,170.75 85.5,170.75 ; 105.13,112.13 106.75,113.75 ; 105.13,112.13 107.606,112.13 ; 106.75,113.75 106.75,112.356 106.846,112.26 107.476,112.26 107.606,112.13 ; 106.75,113.75 107.988,112.512 ; 106.75,113.75 109.226,113.75 ; 107.606,112.13 107.988,112.512 ; 107.988,112.512 108.976,113.5 ; 108.976,113.5 109.226,113.75 ; 145.624,47 146.624,48 ; 145.624,47 145.624,49 ; 145.624,49 146.624,48 ; 146.624,48 164.25,48 164.826,47.424 C26.1@164.826,45.729 ; C26.1@164.826,45.729 U18.8@170.286,45.729 ; R72.2@194,170.69 199.25,170.69 ; 199.25,170.69 200.397,171.837 ; 199.25,170.69 200.397,170.69 ; 199.25,170.69 200.397,169.543 ; 200.397,169.543 200.397,170.69 ; 200.397,170.69 200.397,171.837 ; 200.397,171.837 200.397,175.147 201.25,176 205,176 ; 203.29,37.25 C11.2@203.29,35.75 204.79,35.75 ; 203.29,37.25 204.79,35.75 ; 205,176 207.5,176 ; 205,176 206.25,177.25 ; 206.25,177.25 207.5,176 ; 206.25,177.25 206.25,184.08 ; 206.25,184.08 207.96,185.79 ; 206.25,184.08 206.25,185.79 207.96,185.79 ; 206.25,187.5 207.96,185.79 ; 207.5,176 218.601,176 219.5,175.101 ; 219.5,172.25 220.75,173.5 220.75,173.808 ; 219.5,172.25 219.5,173.75 ; 219.5,173.75 219.558,173.808 220.75,173.808 ; 219.5,173.75 219.5,175.101 ; 219.5,175.101 220.75,173.851 220.75,173.808
ve: P14.18 R42.1 | length 51.4
  Bottom Layer w1: P14.18@21.963,134.596 28.44,134.596 29.456,135.612 29.456,168.706 30.271,169.521 37,169.521 37.711,170.232 R42.1@37.711,171.553 R42.1@37.584,171.426
vo: P14.3 R42.3 | length 11.5
  Bottom Layer w1: P14.3@21.963,172.696 32.123,172.696 32.631,172.188 R42.3@32.631,171.553
WP: P31.5 U15.7 | length 20.6
  Bottom Layer w1: U15.7@216.88,188.46 219.71,188.46 220.5,189.25 220.5,194.25 221.75,195.5 228,195.5 229.295,194.205 P31.5@231.147,194.205
pads on no net: D34.8 D35.8 D36.8 D37.8 D38.8 D39.8 D40.8 D41.8 J2. J2.1 J2.4 J2.5 J2.6 J2.7 J2.8 J2.9 U1.3 U1.4 U1.5 U1.6 U1.7 U1.8 U1.9 U1.10 U1.11 U1.12 U1.13 U1.14 U13.11 U13.12 U13.13 U13.14 U14.7 U16.4

## Other copper
Bottom Layer:
  rectangle net GND: 2.5,129.516 14.5,181.5
  rectangle net VCC: 25,203.25 29,207
  rectangle net VCC: 31.636,151.25 41.25,167.636
  rectangle net VCC: 40.75,151 41.75,168
  rectangle net 12V: 52.75,66 84.75,76
  rectangle net GND: 227.5,197 233.662,201
  rectangle net GND: 13,129.75 16.121,139.676

## Silkscreen, mask and mechanical layers (free items; w line width, h text height)
Top Overlay:
  lines w0.254: 1.897,80.75 60,80.75 ; 1.897,147.931 1.897,181.84 ; 1.897,153.392 1.897,127.865 1.897,127.484 ; 29,127.484 29,150 ; 39,181.713 39,210 ; 39,199 57.75,199 ; 41.14,127.484 60,127.484 60,83.28 ; 41.25,127.484 41.013,127.484 1.897,127.484 ; 41.25,210 1.897,210 1.897,181.713 41.25,181.713 ; 41.267,209.983 57.75,209.983 ; 52,127.5 52,150 ; 57.25,181.713 76.037,181.713 76,181.676 76,160.75 ; 57.463,181.713 41.25,181.713 ; 57.5,150 76,150 76,160.75 ; 57.75,210 57.75,198 57.75,182.25 57.75,181.5 57.75,150 41.25,150 ; 60,32.915 60,34.75 ; 60,34.5 60,83.5 ; 60,77.5 60.025,77.475 ; 60,78.5 85,78.5 ; 95,78.5 161.25,78.5 236,78.5 ; 95.75,78.5 84.75,78.5 84.75,32.915 ; 142.5,70 142.5,78.5 ; 142.5,70.351 142.5,32.915 177.124,32.915 ; 148.124,32.915 94.977,32.915 84.75,32.915 ; 151.25,78.5 151.25,160.75 ; 176.874,32.915 189.75,32.915 189.75,78.5 ; 189.5,32.915 236,32.915 236,77.5 236,160.75 ; 198.5,160.75 198.5,212.25 236,212.25 236,160.75 ; 198.5,178.75 236,178.75 ; 198.5,198.75 236,198.75 ; 1.897,127.484 1.897,34.397 1.897,32.977 1.897,32.915 84.75,32.915 ; 29,150 29,150 ; 29,150 41.25,150 ; 41.25,150 41.25,181.713 ; 76,160.75 236,160.75
Mechanical 13:
  lines w0.254: 4.898,110.276 5.076,110.454 ; 0.5,29 237.5,29 237.5,213 0.5,213 0.5,29

## Text inside footprints (layer, text, board x,y; h text height)
J2: Top Overlay "1" at 225.33,43.487 h1.27 r90; Top Overlay "2" at 225.332,46.161 h1.27 r90; Top Overlay "3" at 225.334,48.957 h1.27 r90; Top Overlay "4" at 225.333,51.624 h1.27 r90; Top Overlay "5" at 225.334,54.419 h1.27 r90; Top Overlay "6" at 231.691,44.63 h1.27 r90; Top Overlay "7" at 231.689,47.557 h1.27 r90; Top Overlay "8" at 231.684,50.227 h1.27 r90; Top Overlay "9" at 231.692,53.156 h1.27 r90